# Altium PCB USRF02.PcbDoc
Units mil, origin at the board's own origin, x right, y up, seen from the top; angles counter-clockwise.
Board outline 1600 x 800 mil, 2 copper layers (Top Layer, Bottom Layer); 40 components, 35 nets, 139 pads, 38 vias.
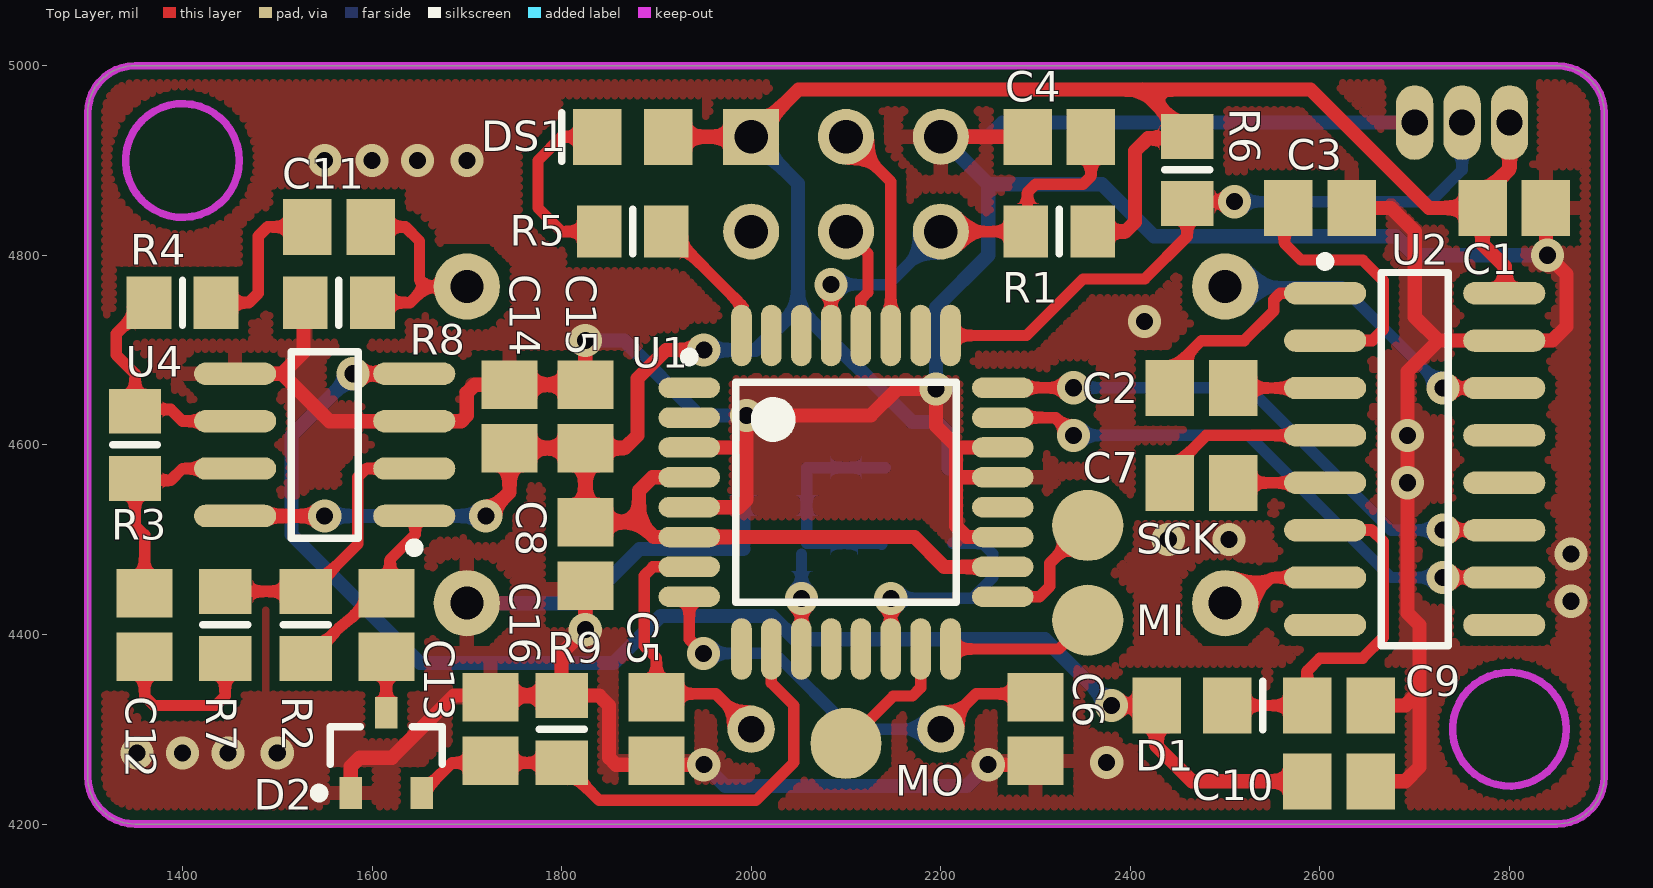
[diagram p0: Top Layer view]
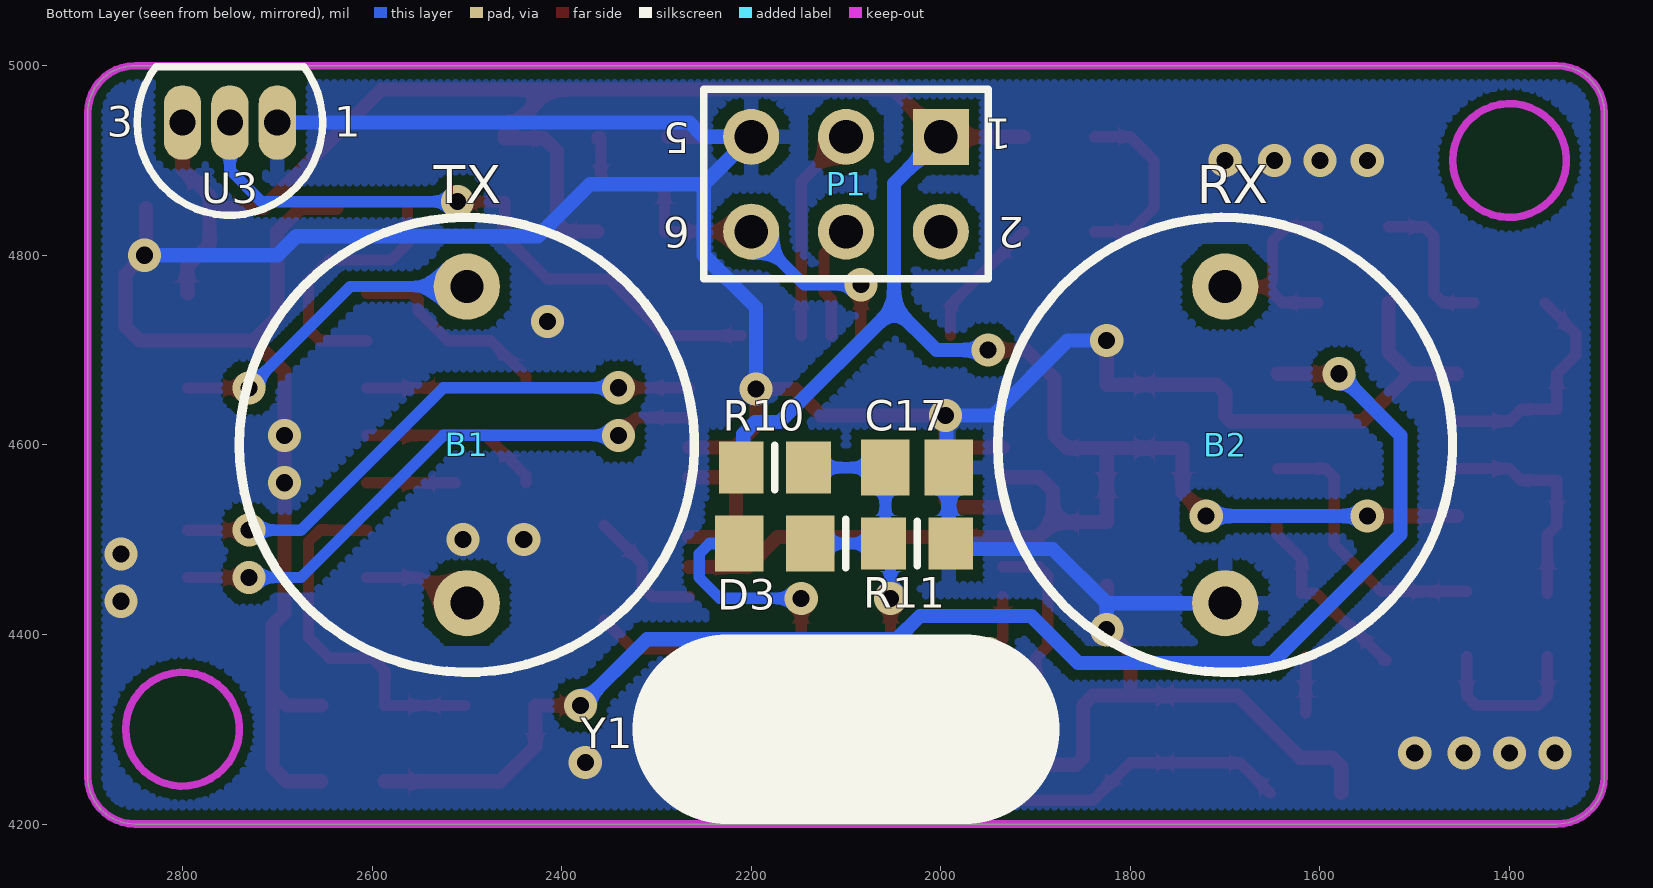
[diagram p1: Bottom Layer view, seen from below]

## Layer stack, top to bottom
Top Solder: solder mask 0.4, Solder Resist, Dk 3.5
Top Layer: signal copper 1.4
Dielectric1: dielectric 12.6, FR-4, Dk 4.8
Bottom Layer: signal copper 1.4
Bottom Solder: solder mask 0.4, Solder Resist, Dk 3.5

## Board outline
1350,4200 cw(c1350,4250) 1300,4250 1300,4950 cw(c1350,4950) 1350,5000 2850,5000 cw(c2850,4950) 2900,4950 2900,4250 cw(c2850,4250) 2850,4200

## Design rules (kind name [scope] priority, off if disabled: settings)
Clearance Clearance_Pins [(HasFootprint('32A_N') OR HasFootprint('TO-92 (In Line)'))] p1: gap=9
Clearance [All] p2: gap=10
FabricationTestPointUsage TestPointUsage [All] p1: valid=0 allowmultiple=FALSE
FabricationTestpoint Testpoint [All] p1: side=3 testpointundercomponent=TRUE minsize=40 maxsize=100 preferedsize=60 minholesize=0 maxholesize=40 preferedholesize=32 testpointgrid=1 allowsidetop=TRUE allowsidebottom=TRUE usegrid=TRUE gridtolerance=0.01
HoleSize [All] p1: absolutevalues=TRUE maxlimit=120 minlimit=1 maxpercent=80.000 minpercent=20.000
PolygonConnect PolygonConnect_Via [IsVia] p1: connectstyle=Direct reliefconductorwidth=15 reliefentries=4 polygonreliefangle="90 Angle" airgapwidth=10
PolygonConnect [All] p2: connectstyle=Relief reliefconductorwidth=15 reliefentries=4 polygonreliefangle="90 Angle" airgapwidth=10
RoomDefinition USRF02 [InComponentClass('USRF02')] p1: confinementstyle=ConfineIn formatcopy=TRUE lockcomponents=FALSE outline 1275,4175 2925,4175 2925,5025 1275,5025
RoutingVias [All] p1: holewidth=28 width=50 viastyle="Through Hole" minholewidth=15 minwidth=35 maxholewidth=28 maxwidth=50
SMDNeckDown [All] p1: percent=80.000
SolderMaskExpansion [All] p1: expansion=4
UnpouredPolygon [All] p1: allowunpoured=FALSE
Width [All] p1: maxlimit=40 minlimit=8 preferedwidth=20
26 further rules are at their usual default settings.

## Components (designator, comment, footprint, x,y, rotation, side; value= is the part's Value field where it differs from the comment)
B1 "TX" TCx40-12T/R/TR 2500,4600 r270 bottom
B2 "RX" TCx40-12T/R/TR 1700,4600 r270 bottom
C1 "100nF" CAPC2012N 2805,4850 r0 top
C2 "1uF" CAPC2012N 2475,4660 r0 top
C3 "1uF" CAPC2012N 2600,4850 r0 top
C4 "100nF" CAPC2012N 2325,4925 r180 top
C5 "22pF" CAPC2012N 1900,4300 r90 top
C6 "22pF" CAPC2012N 2300,4300 r90 top
C7 "1uF" CAPC2012N 2475,4560 r0 top
C8 "100nF" CAPC2012N 1825,4485 r270 top
C9 "1uF" CAPC2012N 2620,4325 r180 top
C10 "22uF" CAPC2012N 2620,4245 r180 top
C11 "1nF" CAPC2012N 1565,4830 r0 top
C12 "100nF" CAPC2012N 1360,4410 r270 top
C13 "1nF" CAPC2012N 1615,4410 r270 top
C14 "100nF" CAPC2012N 1745,4630 r90 top
C15 "1uF" CAPC2012N 1825,4630 r90 top
C16 "1nF" CAPC2012N 1725,4300 r90 top
C17 "15nF" CAPC2012N 2025,4576 r180 bottom
D1 "BAT54" CD2012-0805 2465,4325 r0 top
D2 "BAT54S" SOT-23_L 1615,4275 r90 top
D3 "BAT54" CD2012-0805 2175,4496 r180 bottom
DS1 "LED3" CD2012-0805 1875,4925 r180 top
P1 "IIC" HDR2X3 2000,4925 r0 bottom
R1 "10K" RESC2012N 2325,4825 r0 top
R2 "100K" RESC2012N 1530,4410 r90 top
R3 "1M" RESC2012N 1350,4600 r90 top
R4 "10K" RESC2012N 1400,4750 r0 top
R5 "1K" RESC2012N 1875,4825 r0 top
R6 "4K7" RESC2012N 2460,4890 r90 top
R7 "10K" RESC2012N 1445,4410 r270 top
R8 "3K9" RESC2012N 1565,4750 r0 top
R9 "200K" RESC2012N 1800,4300 r270 top
R10 "1M" RESC2012N 2175,4576 r180 bottom
R11 "47K" RESC2012N 2025,4496 r180 bottom
U1 "ATmega8L-8AI" 32A_N 2100,4550 r0 top
U2 "MAX232CSE" NSO16_N 2700,4585 r0 top
U3 "DS18B20" "TO-92 (In Line)" 2750,4940 r90 bottom
U4 "LMV822" M08A_N 1550,4600 r180 top
Y1 "4M" "Crystal Oscillator 1" 2000,4300 r0 bottom

## Footprints (in the part's own frame and the unit in brackets; to place one, negate y for a bottom-side part, rotate by r counter-clockwise, add the part's x,y. Pads: shape width x height; smd on the part's side, far side on the other; paste and mask are expansions set on the pad)
32A_N [mm] "Thin QFP, 32-Leads, Body 7x7mm, Pitch 0.8mm, IPC Medium Density"
  oval 1.65x0.55 smd: 1(-4.2,2.8) 2(-4.2,2) 3(-4.2,1.2) 4(-4.2,0.4) 5(-4.2,-0.4) 6(-4.2,-1.2) 7(-4.2,-2) 8(-4.2,-2.8) 17(4.2,-2.8) 18(4.2,-2) 19(4.2,-1.2) 20(4.2,-0.4) 21(4.2,0.4) 22(4.2,1.2) 23(4.2,2) 24(4.2,2.8)
  oval 0.55x1.65 smd: 9(-2.8,-4.2) 10(-2,-4.2) 11(-1.2,-4.2) 12(-0.4,-4.2) 13(0.4,-4.2) 14(1.2,-4.2) 15(2,-4.2) 16(2.8,-4.2) 25(2.8,4.2) 26(2,4.2) 27(1.2,4.2) 28(0.4,4.2) 29(-0.4,4.2) 30(-1.2,4.2) 31(-2,4.2) 32(-2.8,4.2)
  silkscreen extent -4.32,-2.95 2.95,3.75, body extent -3.5,-3.5 3.5,3.5, height 1.2
CAPC2012N [mm] "Chip Capacitor, Body 2.0x1.3mm, IPC Medium Density"
  rect 1.3x1.5 smd: 1(-0.85,0) 2(0.85,0)
  body extent -1.1,-0.72 1.1,0.72, height 1.1
CD2012-0805 [mm] "Chip Diode; Body 2.0 x 1.3 mm (LxW typ)"
  rect 1.3x1.5 smd: 1(-0.95,0) 2(0.95,0)
  silkscreen extent 1.9,-0.65 1.9,0.65
"Crystal Oscillator 1" [mil] "200mil pin sapce crystal"
  round 50 hole 28: 1(0,0) 2(200,0)
  silkscreen extent -115,-90 315,90
HDR2X3 [mm] "Connector; Header; 3x2 Position"
  rect 1.5x1.5 hole 0.9: 1(0,0)
  round 1.5 hole 0.9: 2(0,2.54) 3(2.54,0) 4(2.54,2.54) 5(5.08,0) 6(5.08,2.54)
  silkscreen extent -1.27,-1.27 6.35,3.81
M08A_N [mm] "SOIC, 8-Leads, Body 4.9x3.9mm, Pitch 1.27mm, IPC Medium Density"
  oval 2.2x0.6 smd: 1(-2.4,1.905) 2(-2.4,0.635) 3(-2.4,-0.635) 4(-2.4,-1.905) 5(2.4,-1.905) 6(2.4,-0.635) 7(2.4,0.635) 8(2.4,1.905)
  silkscreen extent -2.53,-2.5 0.9,2.88, body extent -1.95,-2.45 1.95,2.45, height 1.76
NSO16_N [mm] "SOIC, 16-Leads, Body 9.9x3.9mm, Pitch 1.27mm, IPC Medium Density"
  oval 2.2x0.6 smd: 1(-2.4,4.445) 2(-2.4,3.175) 3(-2.4,1.905) 4(-2.4,0.635) 5(-2.4,-0.635) 6(-2.4,-1.905) 7(-2.4,-3.175) 8(-2.4,-4.445) 9(2.4,-4.445) 10(2.4,-3.175) 11(2.4,-1.905) 12(2.4,-0.635) 13(2.4,0.635) 14(2.4,1.905) 15(2.4,3.175) 16(2.4,4.445)
  silkscreen extent -2.52,-5 0.9,5.42, body extent -1.95,-4.95 1.95,4.95, height 1.75
RESC2012N [mm] "Chip Resistor, Body 2.0x1.3mm, IPC Medium Density"
  rect 1.2x1.4 smd: 1(-0.9,0) 2(0.9,0)
  silkscreen extent 0,-0.6 0,0.6, body extent -1.07,-0.7 1.07,0.7, height 0.65
SOT-23_L [mm] "SOT23, 3-Leads, Body 2.9x1.3mm, Pitch 0.95mm, Lead Span 2.5mm, IPC High Density"
  rect 0.85x0.6 smd: 1(-1.075,0.95) 2(-1.075,-0.95) 3(1.075,0)
  silkscreen extent -1.2,-1.5 0.7,1.92, body extent -0.7,-1.5 0.7,1.5, height 1.1
TCx40-12T/R/TR [mil] "40KHz, 12mm Ultrasonic Transmitter/Receiver"
  round 70 hole 35: 1(-167,0) 2(167,0)
  silkscreen extent -240,-240 240,240, body extent -238,-240 240,240, height 375
"TO-92 (In Line)" [mm] "TO, Flat Index; 3 In-Line, Axial Leads; Body Dia. 4.5mm; Leads 0.51 x 0.48 mm (max)"
  oval 2x1 hole 0.7: 1(0,-1.27) 2(0,0) 3(0,1.27)
  silkscreen extent -2.48,-2.48 1.5,2.48

## Part data
B1 B2: library part "Ultrasonic TX/RX", "Ultrasonic TX/RX"
C1 C2 C3 C4 C5 C6 C7 C8 C9 C10 C11 C12 C13 C14 C15 C16 C17: library part Cap, "Capacitor"
D1 D3: library part "Diode 1N4148", "High Conductance Fast Diode"
D2: "Schottky Diodes"
DS1: "Typical BLUE SiC LED"
P1: library part "Header 3X2", "Header, 3-Pin, Dual row"
R1 R2 R3 R4 R5 R6 R7 R8 R9 R10 R11: library part Res1, "Resistor"
U1: "8-Bit AVR Microcontroller with 8K Bytes of In-System Programmable Flash Memory"
U2: "+5V Powered, Multi-Channel RS-232 Driver/Receiver"
U3: "Programmable Resolution 1-Wire Digital Thermometer"
U4: library part LMV358M, "Dual General-Purpose, Low-Voltage Rail-to-Rail Output Operational Amplifier"
Y1: library part "Crystal Oscillator 1", "2 Pins crystal"

## Free pads (board coordinates)
  round 75 smd: 0(2100,4285) 0(2355,4415) 0(2355,4515)

## Via types
v1: diameter 35, hole 18, Top Layer to Bottom Layer, tented both sides, 38 vias

## Nets (pads, with @x,y where several pads share a name; then routed paths per layer and width w, separated by ;. In a path a pad name is that pad's centre, name@x,y a point inside that pad or via, vN(x,y) a via of type N, cw(c..) or ccw(c..) an arc to the next point about the centre after c; other vN are vias at no path point)
/RST: C4.1 P1.6 R1.1 U1.29 | length 444.1
  Top Layer w12: U1.29 v1(2084.25,4769) ; P1.6 2291.54,4825 2291.54,4866.54 2300,4875 2350,4875 2358.46,4883.46 C4.1 ; C4.1@2362.4,4922.06 C4.1@2362.4,4925
  Bottom Layer w12: v1(2084.25,4769) 2144,4769 P1.6
ECHO: C16.1 D2.2 R9.2 U1.10 | length 568.3
  Top Layer w12: D2.2 1684.29,4264.57 R9.2 1839.62,4224.94 2004.94,4224.94 2045,4265 2045,4325 2021.26,4348.74 U1.10
GND: B2.2 C1.2 C3.2 C4.2 C5.1 C6.1 C8.2 C9.1 C10.1 C14.2 C15.2 C16.2 C17.2 D2.1 P1.5 R8.1 R9.1 R11.2 U1.3 U1.5 U1.19 U1.21 U1.22 U2.15 U3.1 U4.3 U4.5 | length 5541
  Top Layer w15: U4.5 1505,4675 ; R8.1@1527.6,4750 1527.6,4697.6 1505,4675 ; D2.1 1577.6,4260.6 1587,4270 1620.97,4270 1686.4,4335.43 R9.1 ; C14.2@1732.06,4663.46 C14.2 ; C8.2 v1(1825,4405) 1800,4380 R9.1 ; v1(1825,4710) C15.2 C14.2 ; U1.5 1987.25,4534.25 1995,4542 v1(1995,4631) 2126,4631 2154,4659 v1(2195,4659) 2195,4620 2217.76,4597.24 ; U1.3 1995,4597.24 ; v1(1950,4262.6) 1857.4,4262.6 1850,4270 1850,4325 1839.57,4335.43 R9.1 ; P1.5 C4.2@2287.6,4925 ; v1(2250,4262.6) C6.1@2300,4262.6 ; U1.19 2227.6,4502.76 2216,4514.36 2216,4565.75 ; U1.21 2216,4565.75 ; U1.22 2217.76,4597.24 ; C3.2@2637.4,4850 2675,4850 2700,4825 2700,4735 2725,4710 ; C10.1 2690,4245 2705,4260 2705,4340 ; C9.1 2690,4325 2705,4340 ; v1@2838.46,4806.54 C1.2 ; v1(2840,4800) 2860,4780 2860,4725 2845,4710 2725,4710 ; 1505,4675 1555,4625 U4.3 1694,4625 1700,4631 1700,4655 1708.46,4663.46 C14.2 ; 2216,4565.75 2216,4595.49 2217.76,4597.24 ; 2705,4340 2705,4410 2692.5,4422.5 2692.5,4677.5 2725,4710
  Bottom Layer w15: B2.2 1825,4433 ; v1(1825,4405) 1825,4433 ; v1(1825,4710) 1866,4710 1945,4631 v1(1995,4631) ; v1(1950,4262.6) 1972.6,4240 2227.4,4240 v1(2250,4262.6) ; R11.2@1991.54,4490 1882,4490 1825,4433 ; R11.2@1991.54,4496 C17.2 ; C17.2@1991.54,4575 1994,4577.46 v1@1994,4631 ; v1(2195,4659) 2195,4745 2250,4800 2250,4875 ; v1@2200,4650 v1@2200,4655 ; U3.1 2265,4940 2250,4925 P1.5 2250,4875 ; v1@2835,4800 2700,4800 2680,4820 2425,4820 2370,4875 2250,4875
  other v1: 2375,4265 1352,4275 1400,4275 1448,4275 1500,4275 2865,4435 2865,4485 2440,4500 2504,4500 2692.5,4560 2692.5,4610 2415,4730 1550,4900 1600,4900 1648,4900 1700,4900
INH: D3.1 U1.14 | length 242.4
  Top Layer w12: U1.14 v1(2147.24,4438)
  Bottom Layer w12: v1(2147.24,4438) 2233,4438 2255,4460 2255,4485 2244,4496 D3.1
LED: R5.2 U1.32 | length 141.7
  Top Layer w12: R5.2@1912.4,4825 1989.76,4747.64 U1.32
MISO: pad.0@2355,4415 U1.16 | length 157.3
  Top Layer w12: U1.16 2324.65,4384.65 pad.0@2355,4415
MOSI: pad.0@2100,4285 U1.15 | length 144
  Top Layer w12: pad.0@2100,4285 2150,4335 2170,4335 2178.74,4343.74 U1.15
NetB1_1: B1.1 U2.14 | length 338.8
  Top Layer w12: v1(2730,4660) U2.14
  Bottom Layer w12: B1.1 2623,4767 v1(2730,4660)
NetB1_2: B1.2 U2.7 | length 112.3
  Top Layer w12: B1.2 2550,4460 U2.7
NetB2_1: B2.1 C11.2 R8.2 | length 209.4
  Top Layer w12: R8.2@1602.4,4750 1640,4750 1657,4767 ; C11.2@1602.4,4830 1635,4830 1650,4815 1650,4774 1657,4767 ; B2.1 1657,4767
NetC2_1: C2.1 U2.1 | length 223.7
  Top Layer w12: C2.1@2437.6,4660 2437.6,4672.6 2475,4710 2520,4710 2551.25,4741.25 2551.25,4753.12 2558.12,4760 U2.1
NetC2_2: C2.2 U2.3 | length 93.1
  Top Layer w12: C2.2@2512.4,4660 U2.3
NetC3_1: C3.1 U2.2 | length 275.8
  Top Layer w12: C3.1@2562.6,4850 2562.6,4812.4 2580,4795 2645,4795 2667,4773 2667,4722 2655,4710 U2.2
NetC5_2: C5.2 U1.7 Y1.1 | length 297
  Top Layer w12: U1.7 1896.26,4471.26 1887,4462 1887,4388 1900,4375 1900,4337.4 1962.6,4337.4 Y1.1
NetC6_2: C6.2 U1.8 Y1.2 | length 465
  Top Layer w12: U1.8 1934.65,4395 v1(1949.65,4380) ; Y1.2 2237.4,4337.4 C6.2@2300,4337.4
  Bottom Layer w12: v1(1949.65,4380) 2025,4380 2105,4300 Y1.2
NetC7_1: C7.1 U2.4 | length 193.1
  Top Layer w12: C7.1@2437.6,4560 2437.6,4567.6 2480,4610 U2.4
NetC7_2: C7.2 U2.5 | length 93.1
  Top Layer w12: C7.2@2512.4,4560 U2.5
NetC9_2: C9.2 D1.2 U2.6 | length 383.3
  Top Layer w12: D1.2 C9.2 2586.54,4361.54 2600,4375 2645,4375 2667,4397 2667,4498 2655,4510 U2.6
NetC11_1: C11.1 R4.2 | length 158.5
  Top Layer w12: R4.2@1437.4,4750 1470,4750 1480,4760 1480,4820 1490,4830 C11.1@1527.6,4830
NetC12_1: C12.1 R3.1 U4.7 | length 233.9
  Top Layer w12: C12.1 1360,4505 1350,4515 1350,4562.6 1387.6,4562.6 1400,4575 U4.7
NetC12_2: C12.2 R7.2 | length 176.4
  Top Layer w12: C12.2 1360,4335 1370,4325 1435,4325 1445,4335 R7.2@1445,4376.54
NetC13_1: C13.1 R2.1 U4.1 | length 205.9
  Top Layer w12: R2.1@1530,4372.6 R2.1@1532.94,4372.6 ; R2.1@1532.94,4374.57 1564.47,4406.1 1578.56,4417.84 1604.18,4443.46 C13.1 ; C13.1@1619,4443.46 1619,4479 1645.53,4505.53 1645.53,4523.96 U4.1
NetC13_2: C13.2 D2.3 | length 59.2
  Top Layer w12: D2.3 C13.2
NetDS1_2: DS1.2 R5.1 | length 195.9
  Top Layer w12: R5.1@1837.6,4825 1800,4825 1775,4850 1775,4900 1800,4925 DS1.2
NetR2_2: R2.2 R7.1 U4.2 | length 289.5
  Top Layer w12: R7.1 R2.2 ; R2.2@1535,4445.4 1585,4495.4 1585,4566 1594,4575 U4.2
NetR3_2: R3.2 R4.1 U4.6 | length 245
  Top Layer w12: R4.1@1362.6,4750 1330,4717.4 1330,4695 1350,4675 1350,4637.4 1387.6,4637.4 1400,4625 U4.6
OUT+: U1.24 U2.11 | length 591.4
  Top Layer w12: U1.24 v1(2340,4660.24) ; v1(2730,4510) U2.11
  Bottom Layer w12: v1(2340,4660.24) 2524.76,4660.24 2675,4510 v1(2730,4510)
OUT-: U1.23 U2.10 | length 599
  Top Layer w12: U1.23 2321.26,4628.74 v1(2340,4610) ; v1(2730,4460) U2.10
  Bottom Layer w12: v1(2340,4610) 2525,4610 2675,4460 v1(2730,4460)
REF: C17.1 D3.2 R10.2 R11.1 U1.11 | length 344.6
  Top Layer w12: U1.11 2053,4384.89 v1(2053,4438)
  Bottom Layer w12: v1(2053,4438) R11.1@2053,4484.54 ; D3.2@2137.6,4495 D3.2@2137.6,4497.4 ; D3.2 2058.46,4496 C17.1 R10.2@2141.54,4576
SCK: pad.0@2355,4515 U1.17 | length 135.1
  Top Layer w12: U1.17 2304.1,4439.76 2315,4450.66 2315,4475 pad.0@2355,4515
SCL: P1.4 U1.28 | length 122.4
  Top Layer w12: P1.4 2123.24,4801.76 2123.24,4761.12 2115.75,4753.62 U1.28
SDA: P1.3 U1.27 | length 229.2
  Top Layer w12: P1.3 2147.24,4877.76 U1.27
TEMP: R6.1 U1.25 U3.2 | length 683.5
  Top Layer w12: U1.25 2290.35,4715.35 2350,4775 2415,4775 2460,4820 2460,4856.54 v1(2510,4856.53)
  Bottom Layer w12: v1(2510,4856.53) 2716.53,4856.53 2750,4890 U3.2
VCC: C1.1 C8.1 C14.1 C15.1 DS1.1 P1.1 R1.2 R6.2 R10.1 U1.4 U1.6 U1.18 U2.16 U3.3 U4.8 | length 3215.3
  Top Layer w15: U4.8 v1(1550,4525) ; v1(1720,4525) 1745,4550 C14.1 C15.1 ; DS1.1 P1.1 2050,4975 2412.4,4975 ; U1.4 1895.75,4565.75 1881.54,4551.54 1881.54,4518.46 ; v1(1950,4700) 1910,4700 1880,4670 1880,4610 1866.54,4596.54 C15.1 ; U1.18 2203.74,4471.26 2172.24,4502.76 1897.24,4502.76 1881.54,4518.46 ; R1.2@2362.4,4825 2395,4825 2405,4835 2405,4910 2418.46,4923.46 R6.2@2460,4923.46 ; R6.2@2460,4927.4 2412.4,4975 ; C1.1@2766.54,4850 2715,4850 2590,4975 2412.4,4975 ; U2.16 2795,4760.51 2795,4788.07 2771.54,4811.54 C1.1 2771.54,4862.94 2800,4891.4 U3.3 U3.3@2795.37,4935.37 ; C15.1 C8.1 1881.54,4518.46
  Bottom Layer w15: v1@1548,4525 v1(1720,4525) ; v1(1950,4700) 2004.5,4700 2049.25,4744.75 ; P1.1 2049.25,4875.75 2049.25,4799 2049.25,4744.75 ; R10.1@2208.46,4575 2208.46,4576 2208.46,4611.54 2196,4624 2170,4624 2049.25,4744.75
VEE: C10.2 D1.1 U4.4 | length 1506.3
  Top Layer w15: v1(1580,4675) U4.4 ; v1(2380,4325) D1.1 2427.6,4282.4 2465,4245 C10.2
  Bottom Layer w15: v1(1580,4675) 1515,4610 1515,4505.5 1650.5,4370 1855,4370 1904.51,4419.51 2021.99,4419.51 2046.5,4395 2310,4395 v1(2380,4325)
pads on no net: P1.2 U1.1 U1.2 U1.9 U1.12 U1.13 U1.20 U1.26 U1.30 U1.31 U2.8 U2.9 U2.12 U2.13

## Polygon pours and split planes (outlines as drawn)
GND on Bottom Layer "Bottom Layer-GND" (hatched 90Degree grid 8 track 8, remove dead copper, pour order 4): 1300,5000 2900,5000 2900,4200 1300,4200
GND on Top Layer "Top Layer-GND" (hatched 90Degree grid 8 track 8, remove dead copper, pour order 3): 1300,5000 2900,5000 2900,4200 1300,4200

## Keep-outs
Keep-Out Layer:
  circle w8: c1400,4900 r60
  circle w8: c2800,4300 r60
  lines w8: 1300,4250 ccw(c1350,4250) 1350,4200 2850,4200 ccw(c2850,4250) 2900,4250 2900,4950 ccw(c2850,4950) 2850,5000 1350,5000 ccw(c1350,4950) 1300,4950 1300,4250

## Silkscreen, mask and mechanical layers (free items; w line width, h text height)
Top Overlay:
  text "SCK" at 2406,4485 h32
  text "MI" at 2406,4399 h32
  text "MO" at 2152,4230 h32
Bottom Overlay:
  lines w200: 1975,4300 2225,4300
Bottom Solder:
  text "USRF02 V1.0" at 1392,4375 h40 r270
  text "www.novarobot.cc" at 1327,4240 h40 r270
Mechanical 1:
  circle w8: c2800,4300 r60
  circle w8: c1400,4900 r60
  lines w8: 1300,4250 ccw(c1350,4250) 1350,4200 2850,4200 ccw(c2850,4250) 2900,4250 2900,4950 ccw(c2850,4950) 2850,5000 1350,5000 ccw(c1350,4950) 1300,4950 1300,4250

## Text inside footprints (layer, text, board x,y; h text height)
P1: Bottom Overlay "1" at 1925,4944 h32 r180; Bottom Overlay "2" at 1912,4840 h32 r180; Bottom Overlay "5" at 2265,4940 h32 r180; Bottom Overlay "6" at 2265,4840 h32 r180
U3: Bottom Overlay "3" at 2880,4925 h32; Bottom Overlay "1" at 2640,4925 h32